# Altium PCB PCB_jaustry3.PcbDoc (part 2 of 2)
Units mm, origin at the board's own origin, x right, y up, seen from the top; angles counter-clockwise.
Board outline 112 x 68.3 mm, 9 copper layers (Top Layer (Sig 1), Ground Plane 1, Signal Layer 2, Power Plane 1, Power Plane 2, Signal Layer 3, Mid-Layer 3, Ground Plane 2, Bottom Layer (Sig 4)), stack 1.963 mm thick; 217 components, 291 nets, 863 pads, 308 vias.
Unrouted connection lines stored in the file: 371.
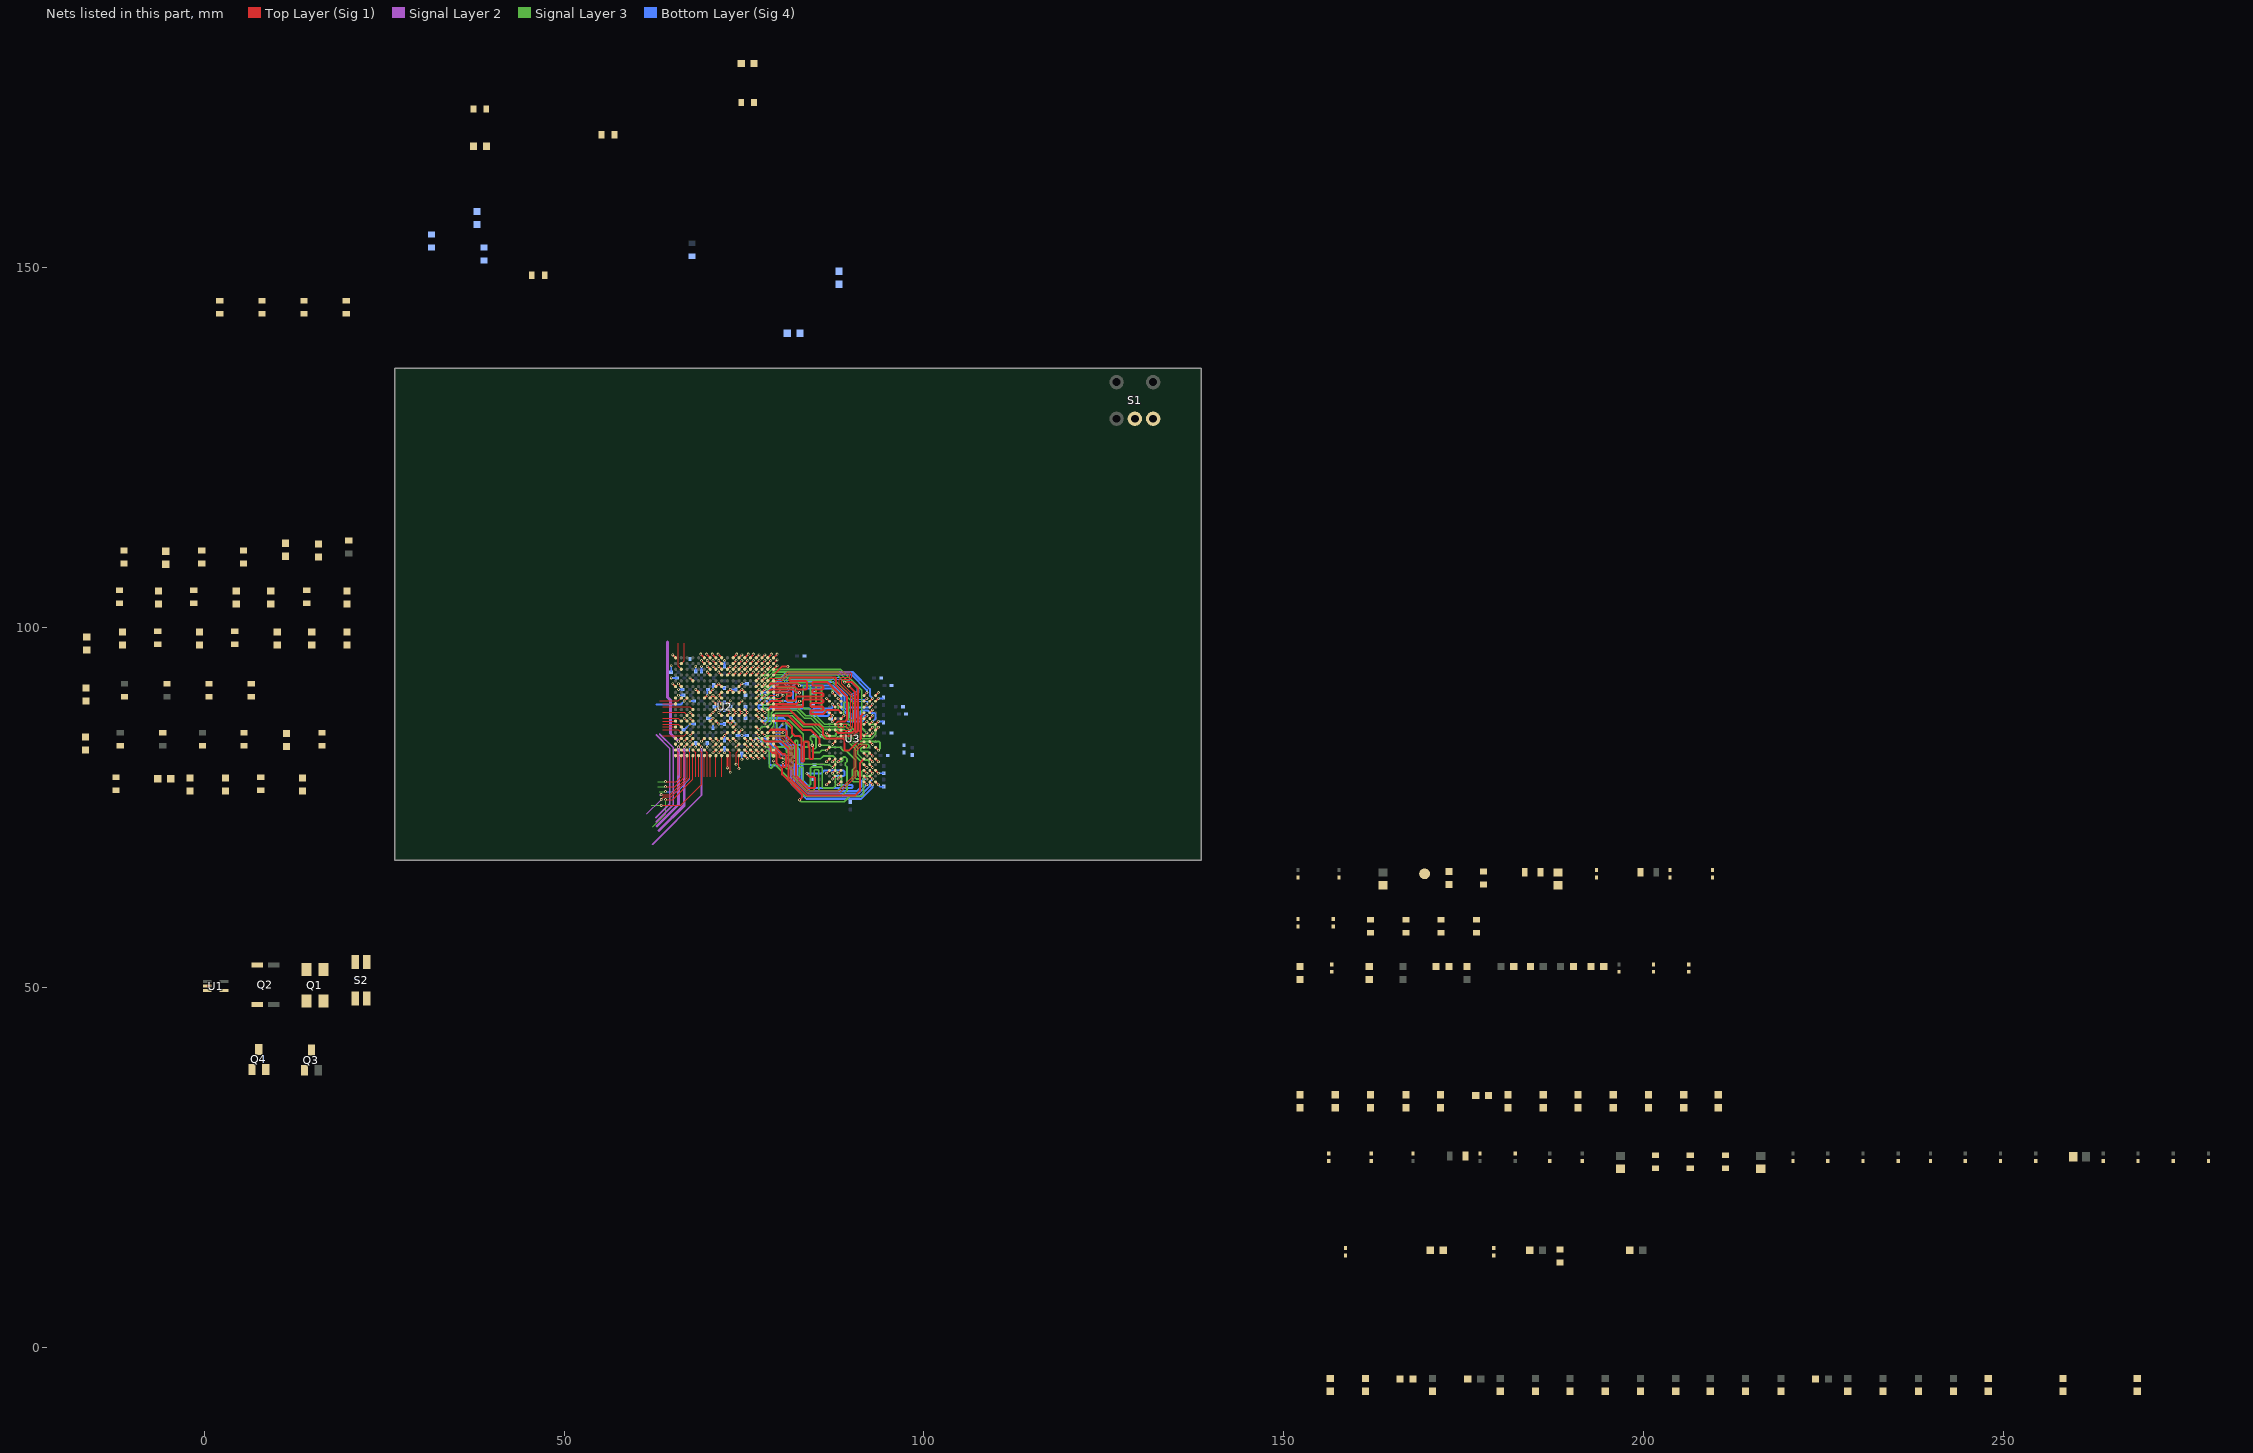
[diagram p8: the nets of this part, all layers, seen from the top]

## Via types
v1: diameter 0.4, hole 0.2, Top Layer (Sig 1) to Bottom Layer (Sig 4), 217 vias
v2: diameter 0.4, hole 0.2, Top Layer (Sig 1) to Bottom Layer (Sig 4), tented bottom, 77 vias
v3: diameter 0.457, hole 0.203, Top Layer (Sig 1) to Bottom Layer (Sig 4), tented both sides, 11 vias
v4: diameter 0.4, hole 0.2, Top Layer (Sig 1) to Bottom Layer (Sig 4), tented both sides, 2 vias
v5: diameter 0.2, hole 0.1, Top Layer (Sig 1) to Bottom Layer (Sig 4), 1 vias

## Nets (pads, with @x,y where several pads share a name; then routed paths per layer and width w, separated by ;. In a path a pad name is that pad's centre, name@x,y a point inside that pad or via, vN(x,y) a via of type N, cw(c..) or ccw(c..) an arc to the next point about the centre after c; other vN are vias at no path point) (continued)
A1: U2.H1 U3.P7 | length 24.1
  Top Layer (Sig 1) w0.25: U3.P7@91.68,80.155 v2(92.08,79.755)
  Top Layer (Sig 1) w0.284: U2.H1@79.1,87.8 81.119,87.801 83.158,85.762 84.301,85.762 85.507,84.556 v3(85.507,83.667)
  Signal Layer 3 w0.234: v3(85.507,83.667) 85.514,83.66 86.777,83.66 87.082,83.356 88.358,83.356 88.809,82.905 89.19,82.905 90.46,81.635 90.46,80.619 90.079,80.238 90.079,78.688 90.206,78.561 90.968,78.561 91.095,78.688 91.095,78.841 90.968,78.968 90.587,78.968 90.46,79.095 90.46,79.984 90.587,80.111 90.714,80.111 90.841,79.984 90.841,79.476 90.968,79.349 91.222,79.349 91.349,79.476 91.349,79.984 91.476,80.111 91.724,80.111 v2(92.08,79.755)
A2: U2.E4 U3.P3 | length 23.9
  Top Layer (Sig 1) w0.15: U2.E4@76.7,85.401 v3(77.1,85.001)
  Top Layer (Sig 1) w0.25: v2(88.08,79.755) U3.P3@88.479,80.155
  Signal Layer 3 w0.234: v3(77.1,85.001) 77.1,84.775 77.7,84.175 80.936,84.175 81.698,84.937 81.698,85.826 80.835,86.689 80.835,86.868 81.082,87.115 81.298,87.115 83.222,85.191 83.222,84.175 83.349,84.048 83.984,84.048 84.086,83.946 84.086,83.515 83.984,83.413 83.349,83.413 83.222,83.286 83.222,81.889 83.349,81.762 85.635,81.762 86.016,82.143 87.413,82.143 87.68,81.876 87.68,80.155 v2(88.08,79.755)
  other v1: 77.1,85
A3: U2.C3 U3.N2 | length 24
  Top Layer (Sig 1) w0.25: U2.C3@77.5,83.8 v1(77.9,83.4) ; v2(87.28,80.555) U3.N2@87.679,80.955
  Signal Layer 3 w0.234: v1@77.901,83.4 78.777,83.4 78.904,83.273 78.904,82.143 79.031,82.016 79.285,82.016 79.412,82.143 79.412,83.273 79.539,83.4 81.622,83.4 81.698,83.324 81.698,83.108 81.622,83.032 80.949,83.032 80.872,82.956 80.872,82.727 80.949,82.651 81.622,82.651 81.698,82.575 81.698,82.346 81.622,82.27 80.949,82.27 80.872,82.194 80.872,81.99 80.949,81.914 81.114,81.914 81.19,81.838 81.19,81.457 81.266,81.381 81.495,81.381 81.571,81.457 81.571,81.838 81.647,81.914 82.003,81.914 82.079,81.99 82.079,84.226 82.155,84.302 82.384,84.302 82.46,84.226 82.46,81.127 82.587,81 86.143,81 86.188,80.955 86.88,80.955 v2(87.28,80.555)
A4: U2.C2 U3.P8 | length 23.9
  Top Layer (Sig 1) w0.25: U3.P8@92.48,80.155 v2(92.88,79.755)
  Top Layer (Sig 1) w0.284: U2.C2@78.298,83.801 78.695,83.404 78.695,82.842 78.934,82.604 79.256,82.604 79.537,82.323 79.537,81.127 80.299,80.365 80.299,79.603 83.093,76.809 83.093,76.428 v3(82.712,76.047)
  Signal Layer 3 w0.234: v3(82.712,76.047) 82.966,75.793 88.935,75.793 89.697,76.555 91.348,76.555 91.602,76.809 91.602,79.095 91.862,79.355 92.478,79.355 v2@92.878,79.755
A5: U2.B1 U3.P2 | length 23.9
  Top Layer (Sig 1) w0.25: v2(87.28,79.755) U3.P2@87.679,80.155
  Top Layer (Sig 1) w0.284: U2.B1@79.099,83 79.315,83 79.919,82.396 79.919,82.015 80.046,81.888 v1@80.427,81.888
  Signal Layer 3 w0.234: v1@80.428,81.889 80.872,81.445 80.872,80.994 81.12,80.746 81.749,80.746 81.825,80.822 81.825,81.432 81.901,81.508 82.13,81.508 82.206,81.432 82.206,79.476 82.333,79.349 82.587,79.349 82.714,79.476 82.714,80.492 82.841,80.619 83.095,80.619 83.222,80.492 83.222,78.333 83.476,78.079 84.111,78.079 84.238,78.206 84.238,80.492 84.365,80.619 85.762,80.619 85.889,80.492 85.889,77.825 86.016,77.698 87.413,77.698 87.679,77.964 87.679,79.356 v2(87.28,79.755)
  other v1: 80.429,81.888
A6: U2.D5 U3.R8 | length 24.1
  Top Layer (Sig 1) w0.25: U2.D5@75.9,84.6 v1(76.3,84.2) ; U3.R8@92.48,79.355 v2(92.88,78.955)
  Bottom Layer (Sig 4) w0.284: v1(76.3,84.2) 76.7,84.6 77.97,84.6 80.173,82.397 80.554,82.397 81.951,81 81.951,78.46 83.856,76.555 91.095,76.555 92.479,77.939 92.479,78.555 v2(92.88,78.955)
A7: U2.E2 U3.R2 | length 24.1
  Top Layer (Sig 1) w0.25: v2(87.28,78.955) U3.R2@87.679,79.355
  Top Layer (Sig 1) w0.284: U2.E2@78.3,85.401 78.7,85.802 80.707,85.802 80.936,85.572 80.936,84.937 82.206,83.667 82.206,79.476 83.984,77.698 84.746,77.698 84.873,77.825 84.873,79.095 84.746,79.222 84.213,79.222 v2(83.73,79.705)
  Bottom Layer (Sig 4) w0.284: v2(83.73,79.705) 85.737,79.705 86.187,80.155 88.81,80.155 88.937,80.028 88.937,79.482 88.81,79.355 87.679,79.355 v2(87.28,78.955)
A8: U2.D4 U3.T8 | length 23.9
  Top Layer (Sig 1) w0.25: U2.D4@76.7,84.6 v1(77.1,84.2) ; U3.T8@92.48,78.555 v2(92.88,78.155)
  Bottom Layer (Sig 4) w0.284: v1(77.1,84.2) 77.862,84.2 78.522,83.54 78.522,81.102 78.77,80.854 81.189,80.854 81.57,80.473 81.57,78.333 83.729,76.174 91.222,76.174 92.88,77.831 v2(92.88,78.155)
A9: U2.C1 U3.R3 | length 24
  Top Layer (Sig 1) w0.25: v2(88.08,78.955) U3.R3@88.479,79.355
  Top Layer (Sig 1) w0.284: U2.C1@79.099,83.8 79.665,83.234 79.665,83.101 80.37,82.396 80.681,82.396 80.827,82.25 80.827,80.735 80.71,80.618 80.544,80.618 80.427,80.735 v1(80.427,81.253)
  Signal Layer 3 w0.234: v1@80.428,81.254 80.428,80.873 80.936,80.365 81.571,80.365 81.825,80.111 81.825,79.222 83.73,77.317 84.619,77.317 84.746,77.444 84.746,80.111 84.873,80.238 85.254,80.238 85.381,80.111 85.381,77.444 85.508,77.317 88.048,77.317 88.556,77.825 88.556,79.222 88.429,79.349 88.207,79.349 88.08,79.222 v2(88.08,78.955)
A10: U2.F4 U3.L7 | length 24
  Top Layer (Sig 1) w0.15: U2.F4@76.642,86.2 U2.F4@76.7,86.2
  Top Layer (Sig 1) w0.25: U2.F4@76.7,86.2 v1(77.1,85.8) ; U3.L7@91.68,82.555 v2(92.08,82.155)
  Signal Layer 3 w0.234: v1(77.1,85.8) 77.5,86.2 78.262,86.2 78.776,86.714 78.776,88.111 79.164,88.499 82.326,88.499 83.412,87.413 84.301,87.413 85.888,85.825 88.936,85.825 90.968,83.793 92.238,83.793 92.365,83.666 92.365,83.412 92.238,83.285 91.349,83.285 91.222,83.158 91.222,82.904 91.349,82.777 92.238,82.777 92.365,82.65 92.365,82.441 v2(92.08,82.155)
A11: U2.F2 U3.R7 | length 21.6
  Top Layer (Sig 1) w0.25: U3.R7@91.68,79.355 v2(92.08,78.955)
  Bottom Layer (Sig 4) w0.284: v1@80.427,86.6 79.919,86.092 79.919,84.556 81.189,83.286 82.459,83.286 82.713,83.032 82.713,78.714 84.11,77.317 90.714,77.317 91.349,77.952 91.349,78.701 91.603,78.955 v2(92.08,78.955)
  other v1: 80.428,86.6
A12: U2.E3 U3.N7 | length 24.1
  Top Layer (Sig 1) w0.25: U2.E3@77.5,85.4 v1(77.9,85) ; U3.N7@91.68,80.955 v2(92.08,80.555)
  Signal Layer 3 w0.234: v1(77.9,85) 77.964,84.937 80.681,84.937 80.935,85.191 80.935,85.572 80.681,85.826 79.792,85.826 79.538,86.08 79.538,87.477 79.792,87.731 81.697,87.731 83.221,86.207 84.491,86.207 86.136,84.562 87.8,84.562 88.047,84.81 88.809,84.81 90.46,83.159 90.46,82.174 v2(92.08,80.555)
A13: U2.H3 U3.T3 | length 24
  Top Layer (Sig 1) w0.25: U2.H3@77.5,87.8 v1(77.9,87.4) ; v2(88.08,78.155) U3.T3@88.479,78.555
  Bottom Layer (Sig 4) w0.284: v1@77.901,87.401 80.504,87.401 80.936,86.969 80.936,84.048 81.317,83.667 82.841,83.667 83.095,83.413 83.095,78.841 84.238,77.698 89.953,77.698 90.08,77.825 90.08,78.028 89.953,78.155 v2(88.08,78.155)
A14: U2.H4 U3.T7 | length 24
  Top Layer (Sig 1) w0.25: U2.H4@76.7,87.8 v1(77.1,87.4) ; U3.T7@91.68,78.555 v2(92.08,78.155)
  Bottom Layer (Sig 4) w0.284: v1@77.1,87.401 77.1,87.375 77.475,87 79.126,87 79.538,86.588 79.538,84.429 82.332,81.635 82.332,78.587 83.983,76.936 90.86,76.936 v2(92.08,78.155)
A15: U2.D3 U3.M7 | length 24.1
  Top Layer (Sig 1) w0.284: U2.D3@77.5,84.6 77.902,84.198 80.151,84.198 81.19,83.159 81.19,79.222 83.73,76.682 90.461,76.682 91.096,77.317 91.096,81.171 U3.M7@91.68,81.755
ACK_N: U2.D1 U3.K7 | length 24
  Top Layer (Sig 1) w0.13: U2.D1@79.1,84.6 79.208,84.707 80.261,84.707 81.571,83.398 81.571,79.348 83.882,77.037 88.277,77.037 90.613,79.373 90.613,82.89 91.435,83.711 91.951,83.711 92.055,83.607 92.055,83.459 91.951,83.355 U3.K7@91.68,83.355
ACK_P: U2.D2 U3.J7 | length 24
  Top Layer (Sig 1) w0.13: U2.D2@78.3,84.6 78.687,84.987 78.935,84.987 78.938,84.99 79.262,84.99 79.265,84.987 80.377,84.987 81.85,83.514 81.85,79.464 83.998,77.316 88.161,77.316 90.334,79.489 90.334,83.006 91.319,83.991 91.516,83.991 U3.J7@91.68,84.155
ADQSL_N: U2.P2 U3.G3 | length 23.3
  Top Layer (Sig 1) w0.13: U2.P2@78.3,92.6 78.684,92.984 78.933,92.984 78.938,92.99 79.262,92.99 79.267,92.984 80.221,92.984 81.088,93.851 89.688,93.851 89.978,93.561 89.978,93.107 89.688,92.816 89.271,92.816 89.263,92.824 88.937,92.824 88.936,92.823 88.843,92.823 88.836,92.816 88.703,92.816 88.55,92.663 88.55,92.181 90.08,90.651 90.08,86.206 89.629,85.755 U3.G3@88.48,85.755
ADQSL_P: U2.P1 U3.F3 | length 23.3
  Top Layer (Sig 1) w0.13: U2.P1@79.1,92.6 79.205,92.705 80.337,92.705 81.204,93.572 89.572,93.572 89.699,93.445 89.699,93.222 89.572,93.095 88.588,93.095 88.271,92.778 88.271,92.065 89.801,90.535 89.801,86.322 89.513,86.035 89.331,86.035 89.255,86.111 89.255,86.517 89.178,86.593 88.95,86.593 88.874,86.517 88.874,86.231 88.797,86.155 88.2,86.155 88.124,86.231 88.124,86.479 88.2,86.555 U3.F3@88.48,86.555
ADQSU_N: U2.L2 U3.B7 | length 20.3
  Top Layer (Sig 1) w0.13: U2.L2@78.3,90.2 78.701,90.6 v1@79.666,90.6 ; U3.B7@91.68,89.755 v2(92.08,90.155)
  Bottom Layer (Sig 4) w0.13: v1@79.665,90.597 79.919,90.851 79.919,91.145 80.21,91.435 80.935,91.435 81.062,91.562 81.062,91.715 80.681,92.096 80.681,92.553 81.22,93.092 89.554,93.092 90.993,91.653 90.993,91.04 90.601,90.648 90.333,90.648 90.206,90.521 90.206,90.165 90.333,90.038 91.965,90.038 v2@92.079,90.152
  other v1: 79.666,90.6
ADQSU_P: U2.L1 U3.C7 | length 20.3
  Top Layer (Sig 1) w0.13: U2.L1@79.1,90.2 80.027,90.2 v1(80.428,90.6) ; U3.C7@91.68,88.955 91.68,88.962 v1(92.075,89.357)
  Bottom Layer (Sig 4) w0.13: v1(80.428,90.6) 80.199,90.829 80.199,91.032 80.326,91.159 81.052,91.159 81.342,91.45 81.342,91.834 80.961,92.215 80.961,92.44 81.337,92.816 88.836,92.816 88.843,92.823 88.936,92.823 88.937,92.824 89.263,92.824 89.271,92.816 89.439,92.816 90.715,91.54 90.715,91.159 90.486,90.93 90.218,90.93 89.928,90.64 89.928,90.053 90.218,89.762 92.118,89.762 92.195,89.686 92.195,89.432 92.118,89.356 v1@92.08,89.356
AGND: C123.2 C124.2 C129.2 C130.2 C131.2 C136.2 C137.1 C138.1 C139.1 C140.2 C179.2 C182.1 C189.1 C193.2 C196.1 R63.2 R75.2 R99.2
"AUDIO IN LEFT": C122.2
"AUDIO IN RIGHT": C127.2
"AUDIO OUT LEFT": R59.2
"AUDIO OUT RIGHT": R72.2
BA0: U2.C4 U3.M2 | length 1.1
  Top Layer (Sig 1) w0.25: U2.C4@76.7,83.8 v1(77.1,83.4) ; v2(87.28,81.355) U3.M2@87.679,81.755
BA1: U2.E1 U3.N8 | length 24.1
  Top Layer (Sig 1) w0.15: U2.E1@79.1,85.4 v1(80.427,85.401)
  Top Layer (Sig 1) w0.25: U2.E1@79.1,85.4 U2.E1@79.125,85.375 ; U3.N8@92.48,80.955 v2(92.88,80.555)
  Signal Layer 3 w0.234: v1(80.427,85.401) 79.201,85.401 78.903,85.699 78.903,86.08 79.157,86.334 79.157,87.858 79.411,88.112 81.951,88.112 83.513,86.55 84.656,86.55 86.269,84.937 87.666,84.937 87.793,85.064 87.793,85.318 87.92,85.445 88.682,85.445 90.813,83.314 90.813,82.425 91.632,81.606 92.238,81.606 92.4,81.444 92.4,81.034 v2(92.88,80.555)
BA2: U2.B3 U3.M3 | length 24.1
  Top Layer (Sig 1) w0.25: U2.B3@77.5,83 v1(77.9,82.6) ; v2(88.08,81.355) U3.M3@88.479,81.755
  Signal Layer 3 w0.234: v1@77.901,82.6 78.205,82.905 78.396,82.905 78.523,82.778 78.523,80.619 78.65,80.492 78.84,80.492 78.967,80.619 78.967,80.873 79.094,81 79.285,81 81.063,79.222 81.063,78.968 83.476,76.555 88.556,76.555 89.318,77.317 89.318,80.619 89.064,80.873 89.064,81.127 89.318,81.381 89.318,81.762 89.064,82.016 88.81,82.016 88.683,81.889 88.683,81.482 88.556,81.355 v2(88.08,81.355)
C_VinL: R65.2
C_VinR: R71.2
C_VoutL+: C142.2
C_VoutL-: C141.2
C_VoutR+: C144.2
C_VoutR-: C143.2
CKE: R13.2 U2.G3 U3.K9 | length 24.1
  Top Layer (Sig 1) w0.25: U2.G3@77.5,87 v1(77.9,86.6) ; U3.K9@93.28,83.355 v2(93.68,82.955)
  Signal Layer 3 w0.234: v1@77.9,86.6 78.395,87.095 78.395,88.619 78.268,88.746 77.76,88.746 77.633,88.873 77.633,89.127 77.76,89.254 79.411,89.254 79.792,88.873 82.459,88.873 83.602,87.73 84.491,87.73 86.015,86.206 89.19,86.206 91.222,84.174 93.762,84.174 93.889,84.047 93.889,83.165 v2(93.68,82.955)
DDR_VREF: C14.1 C16.2 C17.2 C42.1 R4.1 R5.2 U2.J4 U3.H1 U3.M8 | length 1.7
  Top Layer (Sig 1) w0.25: U2.J4@76.7,88.6 v1(77.1,88.2) ; v2(86.48,85.355) U3.H1@86.88,84.955 ; U3.M8@92.48,81.755 v2(92.88,81.355)
DML: U2.M2 U3.E7 | length 23.3
  Top Layer (Sig 1) w0.25: U3.E7@91.68,87.355 v2(92.08,87.755)
  Top Layer (Sig 1) w0.284: U2.M2@78.3,91 78.7,91.4 81.837,91.4 82.282,90.955 v3(82.714,90.955)
  Bottom Layer (Sig 4) w0.284: v3(82.714,90.955) 82.333,90.955 82.206,90.828 82.206,89.381 82.333,89.254 83.095,89.254 83.222,89.381 83.222,91.413 83.349,91.54 87.286,91.54 88.556,90.27 88.556,88.746 89.318,87.984 89.318,87.095 89.445,86.968 91.477,86.968 91.604,87.095 91.604,87.628 91.731,87.755 v2(92.08,87.755)
DMU: U2.J2 U3.D3 | length 20.2
  Top Layer (Sig 1) w0.284: U2.J2@78.3,88.6 78.7,89 83.095,89 83.222,89.127 83.222,89.889 83.349,90.016 85.889,90.016 86.016,89.889 86.016,89.635 85.889,89.508 84.365,89.508 84.238,89.381 84.238,89.127 84.365,89 85.889,89 86.016,88.873 86.016,88.619 85.889,88.492 84.365,88.492 84.238,88.365 84.238,88.111 84.365,87.984 86.016,87.984 86.587,88.555 88.08,88.555 U3.D3@88.48,88.155
DQ0: U2.M3 U3.E3 | length 23.3
  Top Layer (Sig 1) w0.25: U2.M3@77.5,91 v1(77.9,91.4) ; U3.E3@88.48,87.355 v2(88.88,87.755)
  Signal Layer 3 w0.234: v1(77.9,91.4) 78.256,91.4 79.539,92.683 87.032,92.683 90.334,89.381 90.334,87.222 90.207,87.095 89.699,87.095 89.572,87.222 89.572,89.508 89.445,89.635 89.007,89.635 88.88,89.508 v2(88.88,87.755)
DQ1: U2.M4 U3.F7 | length 23.3
  Top Layer (Sig 1) w0.25: U2.M4@76.7,91 v1(77.1,91.4) ; U3.F7@91.68,86.555 v2(92.08,86.955)
  Signal Layer 3 w0.234: v1(77.1,91.4) 77.501,91 77.501,90.434 77.735,90.2 79.355,90.2 80.301,89.254 82.841,89.254 83.349,88.746 83.984,88.746 86.181,86.549 89.483,86.549 91.47,84.561 92.661,84.561 93.28,85.181 93.28,85.529 93.28,86.321 93.045,86.555 92.48,86.555 v2(92.08,86.955)
DQ2: U2.N1 U3.F2 | length 23.3
  Top Layer (Sig 1) w0.284: U2.N1@79.1,91.8 82.073,91.8 82.46,91.413 83.603,91.413 83.73,91.54 83.73,92.429 83.603,92.556 81.444,92.556 81.317,92.683 81.317,92.937 81.444,93.064 87.667,93.064 87.794,92.937 87.794,91.921 89.312,90.403 89.312,87.222 89.048,86.958 88.559,86.958 88.556,86.956 88.08,86.956 U3.F2@87.68,86.555
DQ3: U2.N2 U3.F8 | length 25.8
  Top Layer (Sig 1) w0.15: U2.N2@78.3,91.8 78.699,92.199 ; 78.7,92.2 80.6,92.2
  Top Layer (Sig 1) w0.25: U3.F8@92.48,86.555 v2(92.88,86.955)
  Top Layer (Sig 1) w0.284: U2.N2@78.3,91.8 78.699,92.199 82.435,92.199 v1@82.714,91.921
  Bottom Layer (Sig 4) w0.284: v1@82.714,91.921 87.413,91.921 88.937,90.397 88.937,88.873 89.762,88.047 89.762,87.476 89.889,87.349 90.08,87.349 90.207,87.476 90.207,88.365 90.334,88.492 90.588,88.492 90.715,88.365 90.715,87.476 90.842,87.349 91.096,87.349 91.223,87.476 91.223,88.365 91.35,88.492 92.156,88.492 92.493,88.155 93.083,88.155 93.28,87.959 93.28,87.355 v2(92.88,86.955)
  other v1: 82.714,91.919
DQ4: U2.N3 U3.H3 | length 23.9
  Top Layer (Sig 1) w0.25: U2.N3@77.5,91.8 77.778,92.078 v1(77.9,92.2)
  Top Layer (Sig 1) w0.284: U2.N3@77.5,91.8 77.778,92.078 v1(77.9,92.2) ; U3.H3@88.48,84.955 90.099,84.955 90.842,85.698 90.842,91.54 89.952,92.43 89.951,92.429 v3(89.006,92.429)
  Signal Layer 3 w0.234: v3(77.901,92.201) 77.913,92.201 79.158,93.445 87.921,93.445 88.937,92.429 v3(89.006,92.429)
DQ5: U2.N4 U3.H8 | length 23.3
  Top Layer (Sig 1) w0.25: U2.N4@76.7,91.8 v1(77.1,92.2) ; U3.H8@92.48,84.955 v2(92.88,85.355)
  Signal Layer 3 w0.234: v1(77.1,92.2) 77.501,91.8 78.148,91.8 79.412,93.064 87.286,93.064 90.842,89.508 90.842,85.825 91.731,84.936 92.461,84.936 v2(92.88,85.355)
DQ6: U2.P3 U3.G2 | length 23.8
  Top Layer (Sig 1) w0.25: U2.P3@77.5,92.6 77.504,92.604 v1(77.9,93)
  Top Layer (Sig 1) w0.284: U2.P3@77.5,92.6 77.504,92.604 v1(77.9,93) ; U3.G2@87.68,85.755 88.083,85.352 89.988,85.352 90.461,85.825 90.461,91.032 v3(89.572,91.921)
  Signal Layer 3 w0.234: v3(77.901,93.001) 78.206,93.001 79.031,93.826 88.175,93.826 89.572,92.429 v3(89.572,91.921)
DQ7: U2.P4 U3.H7 | length 23.3
  Top Layer (Sig 1) w0.25: U2.P4@76.7,92.6 v1(77.1,93) ; U3.H7@91.68,84.955 v2(92.08,85.355)
  Signal Layer 3 w0.234: v1(77.1,93) 77.501,93.401 78.098,93.401 78.879,94.182 88.454,94.182 91.35,91.286 91.35,86.085 v2(92.08,85.355)
DQ8: U2.J1 U3.D7 | length 20.3
  Top Layer (Sig 1) w0.284: U2.J1@79.1,88.6 81.336,88.6 83.412,86.523 85.444,86.523 85.952,86.015 85.952,85.126 86.524,84.555 88.81,84.555 88.937,84.428 88.937,83.031 89.064,82.904 89.572,82.904 91.223,84.555 91.223,87.698 U3.D7@91.68,88.155
DQ9: U2.K1 U3.C3 | length 20.3
  Top Layer (Sig 1) w0.284: U2.K1@79.1,89.4 82.352,89.399 v4(82.714,89.762) ; v2(88.08,89.355) U3.C3@88.48,88.955
  Signal Layer 3 w0.234: v4(82.714,89.762) 83.095,89.762 83.222,89.889 83.222,91.794 83.349,91.921 84.111,91.921 84.238,91.794 84.238,89.635 84.365,89.508 84.873,89.508 85,89.635 85,91.794 85.127,91.921 85.635,91.921 85.762,91.794 85.762,88.619 85.889,88.492 87.953,88.492 88.08,88.619 v2(88.08,89.355)
DQ10: U2.K2 U3.C8 | length 20.3
  Top Layer (Sig 1) w0.25: U3.C8@92.48,88.955 v2(92.88,89.355)
  Top Layer (Sig 1) w0.284: U2.K2@78.3,89.4 78.699,89.799 v4(80.428,89.799)
  Bottom Layer (Sig 4) w0.284: v4(80.428,89.799) 80.898,89.799 81.063,89.634 81.698,89.634 81.825,89.761 81.825,91.92 82.333,92.428 87.413,92.428 89.318,90.523 89.318,89.126 89.572,88.872 92.397,88.872 v2(92.88,89.355)
DQ11: U2.K3 U3.C2 | length 20.3
  Top Layer (Sig 1) w0.15: U2.K3@77.5,89.4 U2.K3@77.507,89.4
  Top Layer (Sig 1) w0.25: U2.K3@77.5,89.4 v1(77.9,89.8) ; v2(87.28,89.355) U3.C2@87.68,88.955
  Bottom Layer (Sig 4) w0.284: v1@77.901,89.799 78.142,89.799 78.269,89.672 78.269,89.38 78.142,89.253 77.126,89.253 76.999,89.126 76.999,88.872 77.126,88.745 84.111,88.745 84.238,88.618 84.238,87.856 84.365,87.729 86.651,87.729 86.778,87.856 86.778,88.11 86.651,88.237 84.746,88.237 84.619,88.364 84.619,88.618 84.746,88.745 87.153,88.745 87.28,88.872 v2(87.28,89.355)
DQ12: U2.K4 U3.A7 | length 20.2
  Top Layer (Sig 1) w0.15: U2.K4@76.7,89.4 v1(77.1,89.8)
  Top Layer (Sig 1) w0.25: U3.A7@91.68,90.555 v2(92.08,90.955)
  Bottom Layer (Sig 4) w0.284: v1(77.1,89.8) 77.501,90.2 78.523,90.2 78.65,90.073 78.65,89.952 78.777,89.825 79.031,89.825 79.158,89.952 79.158,91.539 81.126,93.508 89.889,93.508 92.08,91.317 v2(92.08,90.955)
DQ13: U2.L3 U3.A2 | length 20.2
  Top Layer (Sig 1) w0.15: U2.L3@77.5,90.2 v1(77.9,90.6)
  Top Layer (Sig 1) w0.25: v2(87.28,90.955) U3.A2@87.68,90.555
  Signal Layer 3 w0.234: v1@77.901,90.599 78.219,90.599 78.65,91.031 80.809,91.031 80.936,90.904 80.936,89.888 81.063,89.761 82.079,89.761 82.206,89.888 82.206,91.539 82.079,91.666 79.793,91.666 79.666,91.793 79.666,92.199 79.793,92.326 86.753,92.326 87.286,91.793 87.286,90.961 v2(87.28,90.955)
DQ14: U2.L4 U3.B8 | length 20.3
  Top Layer (Sig 1) w0.15: U2.L4@76.7,90.2 v1(77.1,90.599)
  Top Layer (Sig 1) w0.25: U3.B8@92.48,89.755 v2(92.88,90.155)
  Bottom Layer (Sig 4) w0.284: v1(77.1,90.599) 77.501,91 78.11,91 80.936,93.825 90.08,93.825 92.48,91.425 92.48,90.555 v2(92.88,90.155)
DQ15: U2.M1 U3.A3 | length 20.1
  Top Layer (Sig 1) w0.284: U2.M1@79.1,91 79.92,90.999 81.444,91 81.571,90.873 81.571,90.65 81.444,90.523 81.063,90.523 80.936,90.396 80.936,90.015 81.063,89.888 82.079,89.888 82.206,90.015 82.206,90.269 82.333,90.396 85.889,90.396 86.016,90.523 86.016,90.777 85.889,90.904 84.619,90.904 84.492,91.031 84.492,91.285 84.619,91.412 85.889,91.412 86.016,91.539 86.016,91.793 85.889,91.92 84.619,91.92 84.492,92.047 84.492,92.301 84.619,92.428 86.607,92.428 U3.A3@88.48,90.555
DSP_BYPASS: U2.C14 | length 16.9
  Top Layer (Sig 1) w0.25: U2.C14@68.7,83.8 v1(69.1,83.4)
  Signal Layer 2 w0.25: 62.3,69.9 69.1,76.7 v1(69.1,83.4)
EXTINT: U2.B18 | length 3.7
  Top Layer (Sig 1) w0.15: U2.B18@65.5,83 65.9,82.6 65.9,79.5
GND: C13.1 C15.1 C16.1 C17.1 C18.1 C19.1 C20.2 C21.2 C22.1 C23.2 C24.2 C25.2 C26.2 C27.2 C28.2 C29.2 C29_1.2 C30.2 C31.2 C32.2 C33.2 C34.2 C35.2 C36.2 C37.2 C38.2 C42.2 C43.1 C44.1 C45.1 C46.1 C49_1.2 C50_1.2 C51.1 C52_1.2 C53_1.2 C54.2 C55_1.2 C56_1.2 C57_1.2 C58_1.2 C59_1.2 C60_1.2 C61_1.2 C62.2 C63.2 C64.2 C65_1.2 C66_1.2 C67.2 C68_1.2 C69.2 C70.2 C71.2 C72.2 C73.2 C74.2 C75_1.2 C76.2 C77_1.2 C78_1.2 C79_1.2 C80_1.2 C81_1.2 C82_1.2 C83.1 C84.1 C85.1 C86.1 C87_1.1 C88_1.2 C89_1.2 C90_1.2 C91.2 C92_1.2 C93.2 C94_1.2 C95.1 C96.1 C97.1 C98.1 C99_1.2 C100.2 C101.2 C102.2 C103.2 C106_1.1 C107.2 C108_1.1 C109_1.2 C110_1.2 C111_1.2 C112.2 C113.2 C114.1 C132.2 C133.1 L3.1 Q1.2 Q1.4 R5.1 R11.2 R13.1 R14.1 R15.1 R16.1 R36.1 R37.1 R38.1 R39.1 R40.1 R41.1 R42.1 R43.1 R44.1 R45.1 R46.1 R47.1 R48.1 R49.1 R50.1 R51.1 S2.1 S2.3 U1.3 U2.A1 U2.A5 U2.A18 U2.F8 U2.G8 U2.G9 U2.G11 U2.G12 U2.H6 U2.H7 U2.H8 U2.H9 U2.H10 U2.H12 U2.J6 U2.J7 U2.J8 U2.J9 U2.J10 U2.J11 U2.K7 U2.K9 U2.K10 U2.K11 U2.L10 U2.L11 U2.L12 U2.L13 U2.M6 U2.M7 U2.M8 U2.M9 U2.M10 U2.M12 U2.M14 U2.N7 U2.N10 U2.N11 U2.V1 U2.V11 U2.V18 U3.A9 U3.B1 U3.B3 U3.B9 U3.D1 U3.D8 U3.E1 U3.E2 U3.E8 U3.F9 U3.G1 U3.G8 U3.G9 U3.J2 U3.J8 U3.M1 U3.M9 U3.P1 U3.P9 U3.T1 U3.T9 | length 60.4
  Top Layer (Sig 1) w0.25: v1(65.1,96.2) U2.V18@65.5,95.8 ; v1(68.3,91.4) U2.M14@68.7,91 ; U2.L13@69.5,90.2 v1(69.9,90.6) ; U2.G12@70.3,87 v1(70.7,87.4) ; U2.H12@70.3,87.8 v1(70.7,88.2) U2.J11@71.1,88.6 ; U2.L12@70.3,90.2 v1(70.7,90.6) U2.L11@71.1,90.2 ; U2.M12@70.3,91 v1(70.7,91.4) ; v1(70.6,96.3) U2.V11@71.1,95.8 ; v1(70.7,89.8) U2.K11@71.1,89.4 ; U2.G11@71.1,87 v1(71.5,86.6) ; U2.N11@71.1,91.8 v1(71.5,92.2) U2.N10@71.9,91.8 U2.N10@71.875,91.775 ; v1(71.5,88.2) U2.H10@71.9,87.8 ; v1(71.5,89) U2.J10@71.9,88.6 ; v1(71.5,89.8) U2.K10@71.9,89.4 ; U2.L10@71.9,90.2 v1(71.5,90.6) U2.M10@71.9,91 ; U2.G9@72.7,87 v1(73.1,86.6) U2.G8@73.5,87 ; U2.H9@72.7,87.8 v1(73.1,88.2) U2.J9@72.7,88.6 ; U2.K9@72.7,89.4 v1(73.1,89.8) ; U2.M9@72.7,91 v1(73.1,91.4) U2.M8@73.5,91 ; U2.F8@73.5,86.2 v1(73.9,86.6) ; U2.H8@73.5,87.8 v1(73.9,88.2) U2.J8@73.5,88.6 ; U2.H7@74.3,87.8 v1(74.7,88.2) U2.J7@74.3,88.6 ; U2.K7@74.3,89.4 v1(74.7,89.8) ; U2.M7@74.3,91 v1(74.7,91.4) U2.M6@75.1,91 ; U2.N7@74.3,91.8 v1(74.7,92.2) ; U2.H6@75.1,87.8 v1(75.5,88.2) U2.J6@75.1,88.6 ; U2.A5@75.9,82.2 v1(76.3,81.8) ; U2.V1@79.1,95.8 v1(79.6,96.3) ; v2(86.48,78.155) U3.T1@86.879,78.555 ; v2(86.48,79.755) U3.P1@86.879,80.155 ; v2(86.48,81.355) U3.M1@86.879,81.755 ; v2(86.48,90.155) U3.B1@86.88,89.755 ; U3.E1@86.88,87.355 v2(87.28,87.755) U3.D1@86.88,88.155 ; v2(87.263,86.938) U3.E2@87.68,87.355 ; v2(87.28,83.755) U3.J2@87.68,84.155 ; v2(88.08,90.155) U3.B3@88.48,89.755 ; U3.J8@92.48,84.155 v2(92.88,83.755) ; U3.G8@92.48,85.755 v2(92.88,86.155) ; U3.E8@92.48,87.355 v2(92.88,87.755) ; U3.D8@92.48,88.155 v2(92.88,88.555) ; U3.T9@93.28,78.555 v2(93.68,78.155) ; U3.P9@93.28,80.155 v2(93.68,79.755) ; U3.M9@93.28,81.755 v2(93.68,81.355) ; U3.G9@93.28,85.755 v2(93.68,86.155) ; U3.F9@93.28,86.555 v2(93.68,86.955) ; U3.B9@93.28,89.755 v2(93.68,90.155) ; U3.A9@93.28,90.555 v2(93.68,90.955)
  Bottom Layer (Sig 4) w0.15: v2(93.68,79.755) v2(93.68,79.755)
  Bottom Layer (Sig 4) w0.25: v1@64.892,93.008 v1(64.9,93) C89_1.2@65.692,93 ; C90_1.2@64.9,93.9 v1(64.9,94.692) ; v1(65.9,90.6) C65_1.2@66.592,90.6 ; v1(65.9,91.4) C78_1.2@66.492,91.4 ; C87_1.1@66.592,85.8 66.7,85.8 v1(67.5,86.6) C75_1.2@68.092,86.6 ; v1(67.5,89.8) C58_1.2@68.092,89.8 ; v1@68.292,91.408 v1(68.3,91.4) ; v1(68.3,83.4) C88_1.2@68.3,83.992 ; C92_1.2@68.3,93.908 v1(68.3,94.6) ; C79_1.2@69.1,93.908 v1(69.1,94.6) ; v1(69.9,83.4) C81_1.2@69.9,83.992 ; v1(69.9,90.6) 69.9,91.392 C61_1.2@69.908,91.4 ; C77_1.2@70.008,87.4 v1(70.7,87.4) v1@70.682,87.418 ; C50_1.2@70.7,86.008 v1(70.7,86.6) ; v1(70.7,91.4) C68_1.2@70.7,91.992 ; C57_1.2@70.908,89 v1(71.5,89) ; v1(71.5,86.6) C49_1.2@72.3,86.6 ; v1(71.5,88.2) 71.808,88.508 C52_1.2@72.3,88.508 ; v1(71.5,89.8) 71.708,89.592 C60_1.2@72.3,89.592 ; v1(71.5,92.2) 72.108,91.592 C59_1.2@72.3,91.592 ; v1(72.3,82.6) C99_1.2@72.3,83.292 C99_1.2@72.408,83.4 ; C108_1.1@72.3,94.608 v1(72.3,95.4) ; C56_1.2@73.1,89 v1(73.1,89.8) ; v1(73.1,91.4) 73.892,91.4 C82_1.2@73.9,91.392 ; C55_1.2@73.192,87.492 C55_1.2@73.192,87.4 73.192,87.308 v1(73.9,86.6) ; C94_1.2@74.108,85 v1(74.7,85) C29_1.2@75.392,85 ; v1(74.7,81.7) C106_1.1@74.7,82.492 ; v1(74.7,89.8) v1@74.708,89.808 ; v1(74.7,92.2) C66_1.2@75.392,92.2 ; C111_1.2@75.192,87.4 75.192,87.892 v1(75.5,88.2) 75.192,88.508 C109_1.2@75.192,89 ; v2(93.68,78.155) 93.945,77.89 C34.2@94.432,77.89 ; v2(93.68,79.755) C31.2@94.432,79.756 ; v2(93.68,86.955) C25.2@94.279,86.955 ; v2(93.68,90.155) C28.2@94.29,90.155
  other v1: 79.114,81.471
GNDA_ADC: C47.2 C48.2 C104.2 C105.1 L3.2 U2.A9 U2.E8 | length 2.3
  Top Layer (Sig 1) w0.25: v1(72.7,80.5) U2.A9@72.7,82.2 ; U2.E8@73.5,85.4 v1(73.9,85.8)
GPIO_INTERRUPT: U2.L18
I2C0_SCL: U2.C16 | length 13.6
  Top Layer (Sig 1) w0.25: v1(66.7,83.4) U2.C16@67.1,83.8
  Signal Layer 2 w0.4: 63.2,71.8 66.7,75.3 v1(66.7,83.4)
I2C0_SDA: U2.C17 | length 12.8
  Top Layer (Sig 1) w0.25: v1(65.9,83.4) U2.C17@66.3,83.8
  Signal Layer 2 w0.4: 62.936,72.436 65.9,75.4 v1(65.9,83.4)
I2C1_SCL: U2.D15 | length 0.6
  Top Layer (Sig 1) w0.25: v1(67.5,84.2) U2.D15@67.9,84.6
I2C1_SDA: U2.D16 | length 0.6
  Top Layer (Sig 1) w0.25: v1(66.7,84.2) U2.D16@67.1,84.6
I2C2_SCL: U2.D17 | length 15
  Top Layer (Sig 1) w0.25: v1(65.9,84.2) U2.D17@66.3,84.6
  Signal Layer 2 w0.4: 64.4,98 64.4,90.3 64.8,89.9 64.8,85.3 v1(65.9,84.2)
I2C2_SDA: U2.D18
LCD_B0: U2.U10 | length 0.6
  Top Layer (Sig 1) w0.25: v1(71.5,95.4) U2.U10@71.9,95
LCD_B1: U2.U12 | length 0.6
  Top Layer (Sig 1) w0.25: v1(69.9,95.4) U2.U12@70.3,95
LCD_B2: U2.V13 | length 0.7
  Top Layer (Sig 1) w0.25: v1(69,96.3) U2.V13@69.5,95.8
LCD_B3: R31.1 R47.2 U2.U4 | length 0.6
  Top Layer (Sig 1) w0.25: U2.U4@76.7,95 v1(77.1,95.4)
LCD_B4: R32.1 R48.2 U2.V2 | length 0.7
  Top Layer (Sig 1) w0.25: U2.V2@78.3,95.8 v1(78.8,96.3)
LCD_B5: R33.1 R49.2 U2.V3 | length 0.6
  Top Layer (Sig 1) w0.25: U2.V3@77.5,95.8 v1(77.9,96.2)
LCD_B6: R34.1 R50.2 U2.V4 | length 0.6
  Top Layer (Sig 1) w0.25: U2.V4@76.7,95.8 v1(77.1,96.2)
LCD_B7: R35.1 R51.2 U2.T5 | length 0.6
  Top Layer (Sig 1) w0.25: U2.T5@75.9,94.2 v1(76.3,94.6)
LCD_BKL: Q3.3 R16.2 U2.C18
LCD_CLK: U2.V5 | length 0.7
  Top Layer (Sig 1) w0.25: U2.V5@75.9,95.8 76.3,96.2 v1(76.3,96.3)
LCD_DE: U2.R6 | length 0.6
  Top Layer (Sig 1) w0.25: U2.R6@75.1,93.4 v1(75.5,93.8)
LCD_G0: U2.T10 | length 0.6
  Top Layer (Sig 1) w0.25: v1(71.5,94.6) U2.T10@71.9,94.2
LCD_G1: U2.T12 | length 0.6
  Top Layer (Sig 1) w0.25: v1(69.9,94.6) U2.T12@70.3,94.2
LCD_G2: R25.1 R41.2 U2.T2 | length 0.6
  Top Layer (Sig 1) w0.25: U2.T2@78.3,94.2 v1(78.7,94.6)
LCD_G3: R26.1 R42.2 U2.T3 | length 0.6
  Top Layer (Sig 1) w0.25: U2.T3@77.5,94.2 v1(77.9,94.6)
LCD_G4: R27.1 R43.2 U2.T4 | length 0.6
  Top Layer (Sig 1) w0.25: U2.T4@76.7,94.2 v1(77.1,94.6)
LCD_G5: R28.1 R44.2 U2.U1 | length 0.7
  Top Layer (Sig 1) w0.25: U2.U1@79.1,95 v1(79.6,95.5)
LCD_G6: R29.1 R45.2 U2.U2 | length 0.6
  Top Layer (Sig 1) w0.25: U2.U2@78.3,95 v1(78.7,95.4)
LCD_G7: R30.1 R46.2 U2.U3 | length 0.6
  Top Layer (Sig 1) w0.25: U2.U3@77.5,95 v1(77.9,95.4)
LCD_HSYNC: U2.R5 | length 0.6
  Top Layer (Sig 1) w0.25: U2.R5@75.9,93.4 v1(76.3,93.8)
LCD_R0: U2.T11 | length 0.6
  Top Layer (Sig 1) w0.25: v1(70.7,94.6) U2.T11@71.1,94.2
LCD_R1: U2.R12 | length 0.6
  Top Layer (Sig 1) w0.25: v1(69.9,93.8) U2.R12@70.3,93.4
LCD_R2: U2.U13 | length 0.6
  Top Layer (Sig 1) w0.25: v1(69.1,95.4) U2.U13@69.5,95
LCD_R3: R20.1 R36.2 U2.R1 | length 2.5
  Top Layer (Sig 1) w0.25: U2.R1@79.1,93.4 80.268,94.568 v1(81.107,94.568)
LCD_R4: R21.1 R37.2 U2.R2
LCD_R5: R22.1 R38.2 U2.R3 | length 0.6
  Top Layer (Sig 1) w0.25: U2.R3@77.5,93.4 v1(77.9,93.8)
LCD_R6: R23.1 R39.2 U2.R4 | length 0.6
  Top Layer (Sig 1) w0.25: U2.R4@76.7,93.4 v1(77.1,93.8)
LCD_R7: R24.1 R40.2 U2.T1 | length 0.7
  Top Layer (Sig 1) w0.25: U2.T1@79.1,94.2 v1(79.6,94.7)
LCD_VSYNC: U2.U5 | length 0.6
  Top Layer (Sig 1) w0.25: U2.U5@75.9,95 v1(76.3,95.4)
LCD_X1: C43.2 U2.B6 | length 0.6
  Top Layer (Sig 1) w0.25: U2.B6@75.1,83 v1(75.5,82.6)
LCD_X2: C44.2 U2.C7 | length 0.6
  Top Layer (Sig 1) w0.25: v1(73.9,83.4) U2.C7@74.3,83.8
LCD_Y1: C45.2 U2.B7 | length 2.2
  Top Layer (Sig 1) w0.15: v1(73.9,81) 73.9,82.6 U2.B7@74.3,83
LCD_Y2: C46.2 U2.A7 | length 1.8
  Top Layer (Sig 1) w0.15: v1(74.3,80.4) U2.A7@74.3,82.2
LDO_PGOOD: U2.B5 | length 0.6
  Top Layer (Sig 1) w0.25: U2.B5@75.9,83 v1(76.3,82.6)
McASP0_BCLK: U2.A13 | length 2.9
  Top Layer (Sig 1) w0.15: 69.5,79.3 U2.A13@69.5,82.2
McASP0_LRCLK: U2.B13 | length 3.9
  Top Layer (Sig 1) w0.15: U2.B13@69.5,83 69.9,82.6 69.9,79.3
McASP0_MISO: U2.D13 | length 0.6
  Top Layer (Sig 1) w0.25: v1(69.1,84.2) U2.D13@69.5,84.6
McASP0_MOSI: U2.D12 | length 0.6
  Top Layer (Sig 1) w0.25: U2.D12@70.3,84.6 v1(70.7,84.2)
McASP0_SCLK: U2.A14 | length 2.9
  Top Layer (Sig 1) w0.15: 68.7,79.3 U2.A14@68.7,82.2
MIDI: 
NALE: U2.R7 | length 0.6
  Top Layer (Sig 1) w0.25: U2.R7@74.3,93.4 v1(74.7,93.8)
NCE0: U2.U6 U2.V6 | length 1.3
  Top Layer (Sig 1) w0.25: U2.U6@75.1,95 v1(75.5,95.4) ; U2.V6@75.1,95.8 v1(75.6,96.3)
NCLE: U2.T6 | length 0.6
  Top Layer (Sig 1) w0.25: U2.T6@75.1,94.2 v1(75.5,94.6)
NDQ0: U2.U7 | length 0.6
  Top Layer (Sig 1) w0.25: U2.U7@74.3,95 v1(74.7,95.4)
NDQ1: U2.V7 | length 0.6
  Top Layer (Sig 1) w0.25: U2.V7@74.3,95.8 v1(74.7,96.2)
NDQ2: U2.R8 | length 0.6
  Top Layer (Sig 1) w0.25: U2.R8@73.5,93.4 v1(73.9,93.8)
NDQ3: U2.T8 | length 0.6
  Top Layer (Sig 1) w0.25: U2.T8@73.5,94.2 v1(73.9,94.6)
NDQ4: U2.U8 | length 0.6
  Top Layer (Sig 1) w0.25: U2.U8@73.5,95 v1(73.9,95.4)
NDQ5: U2.V8 | length 0.7
  Top Layer (Sig 1) w0.25: U2.V8@73.5,95.8 v1(74,96.3)
NDQ6: U2.R9 | length 0.6
  Top Layer (Sig 1) w0.25: U2.R9@72.7,93.4 v1(73.1,93.8)
NDQ7: U2.T9 | length 0.6
  Top Layer (Sig 1) w0.25: U2.T9@72.7,94.2 v1(73.1,94.6)
NetC1_2: 
NetC8_1: S1.3
NetC8_2: 
NetC9_1: 
NetC9_2: 
NetC10_2: 
NetC13_2: C13.2 R3.1 S2.2 S2.4 U1.4 U2.A10 | length 2.9
  Top Layer (Sig 1) w0.15: 71.9,79.3 U2.A10@71.9,82.2
NetC15_2: C15.2 Q1.3 U2.V10 | length 0.7
  Top Layer (Sig 1) w0.25: v1(71.4,96.3) U2.V10@71.9,95.8
NetC18_2: C18.2 Q1.1 U2.U11 | length 0.6
  Top Layer (Sig 1) w0.25: v1(70.7,95.4) U2.U11@71.1,95
NetC19_2: C19.2 Q2.2 U2.A6 | length 0.6
  Top Layer (Sig 1) w0.25: U2.A6@75.1,82.2 v1(75.5,81.8)
NetC22_2: C22.2 Q2.1 U2.A4 | length 0.6
  Top Layer (Sig 1) w0.25: U2.A4@76.7,82.2 v1(77.1,81.8)
NetC39_1: R10.2
NetC84_2: C84.2 U2.D9 | length 0.6
  Top Layer (Sig 1) w0.25: U2.D9@72.7,84.6 v1(73.1,84.2)
NetC85_2: C85.2 U2.D11 | length 0.6
  Top Layer (Sig 1) w0.25: U2.D11@71.1,84.6 v1(71.5,84.2)
NetC86_2: C86.2 U2.C10 | length 0.6
  Top Layer (Sig 1) w0.25: v1(71.5,83.4) U2.C10@71.9,83.8
NetC99_1: C99_1.1 C100.1 C101.1 C102.1 C103.1 L1.1 U2.D10 U2.E7 U2.E9 U2.H15 U2.R10 | length 3.5
  Top Layer (Sig 1) w0.25: v1(67.5,88.2) U2.H15@67.9,87.8 ; v1(71.5,93.8) U2.R10@71.9,93.4 ; U2.D10@71.9,84.6 v1(72.3,85) U2.E9@72.7,85.4 ; U2.E7@74.3,85.4 v1(74.7,85.8)
  Bottom Layer (Sig 4) w0.25: C99_1.1@72.3,84.308 v1@72.3,85
NetC107_1: C107.1 U2.D6 | length 0.6
  Top Layer (Sig 1) w0.25: U2.D6@75.1,84.6 v1(75.5,84.2)
NetC117_2: 
NetC119_1: C119.1 R56.2 R59.1
NetC119_2: C119.2 R58.2
NetC120_1: C120.1 R62.2 R65.1
NetC120_2: C120.2 R62.1 R64.2
NetC121_1: C121.1 R60.2 R61.1 R63.1
NetC121_2: C121.2 R56.1 R57.2 R58.1
NetC122_1: C122.1 R64.1
NetC123_1: C123.1 R61.2
NetC125_1: C125.1 R67.2 R71.1
NetC125_2: C125.2 R67.1 R70.2
NetC126_1: C126.1 R66.2 R72.1
NetC126_2: C126.2 R69.2
NetC127_1: C127.1 R70.1
NetC128_1: C128.1 R73.2 R74.1 R75.1
NetC128_2: C128.2 R66.1 R68.2 R69.1
NetC130_1: C130.1 R74.2
NetC141_1: C141.1 R57.1
NetC142_1: C142.1 R60.1
NetC143_1: C143.1 R68.1
NetC144_1: C144.1 R73.1
NetC158_2: 
NetC159_2: 
NetC160_2: 
NetC171_2: 
NetC172_2: Q4.3 R17.1
NetC176_1: 
NetC176_2: 
NetC177_1: 
NetC177_2: 
NetC178_1: C179.1
NetC178_2: 
NetC181_2: C182.2
NetC183_2: 
NetC184_1: 
NetC184_2: 
NetC190_1: C190.1 R105.1
NetC190_2: C190.2 R105.2 R106.1
NetC191_1: R106.2
NetC191_2: 
NetC192_1: C193.1
NetC192_2: 
NetC195_2: C196.2
NetC197_2: 
NetC198_1: C198.1 R112.2 R116.1
NetC198_2: C198.2 R116.2
NetC199_1: 
NetC199_2: 
NetC200_1: 
NetC200_2: 
NetC201_2: 
NetC202_1: 
NetC203_1: 
NetC203_2: 
NetC204_1: 
NetC204_2: 
NetC205_2: 
NetC206_1: 
NetD9_1: 
NetD9_2: 
NetD10_1: 
NetD11_2: 
NetJ1_3: S1.2
NetJ2_1: J2.1 U2.A3 | length 0.6
  Top Layer (Sig 1) w0.25: U2.A3@77.5,82.2 77.9,81.8
NetJ4_5: 
NetJ4_6: 
NetJ4_11: 
NetJ4_12: 
NetL5_1: 
NetL6_1: 
NetL7_1: 
NetP4_1: U2.A12 | length 2.9
  Top Layer (Sig 1) w0.15: 70.3,79.3 U2.A12@70.3,82.2
NetP4_2: U2.C11 | length 0.6
  Top Layer (Sig 1) w0.25: v1(70.7,83.4) U2.C11@71.1,83.8
NetP4_3: U2.A11 | length 2.9
  Top Layer (Sig 1) w0.15: 71.1,79.3 U2.A11@71.1,82.2
NetP4_4: U2.B11 | length 0.6
  Top Layer (Sig 1) w0.25: v1(70.7,82.6) U2.B11@71.1,83
NetP4_5: U2.B10 | length 0.6
  Top Layer (Sig 1) w0.25: v1(71.5,82.6) U2.B10@71.9,83
NetP5_1: U2.E16 | length 3.6
  Top Layer (Sig 1) w0.15: 63.7,85 66.7,85 U2.E16@67.1,85.4
NetP5_2: U2.E15 | length 0.6
  Top Layer (Sig 1) w0.25: v1(67.5,85) U2.E15@67.9,85.4
NetP8_1: 
NetP8_2: R17.2 R18.2
NetP10_4: 
NetQ3_1: Q3.1 Q4.2
NetQ4_1: Q4.1 R18.1
NetR6_1: R6.1 U2.V12 | length 0.7
  Top Layer (Sig 1) w0.25: v1(69.8,96.3) U2.V12@70.3,95.8
NetR9_2: R9.2
NetR11_1: R11.1 U3.L8 | length 0.6
  Top Layer (Sig 1) w0.25: U3.L8@92.48,82.555 v2(92.88,82.155)
NetR14_2: R14.2 U2.J3 | length 0.6
  Top Layer (Sig 1) w0.25: U2.J3@77.5,88.6 v1(77.9,88.2)
NetR15_2: R15.2 U2.B4 | length 0.6
  Top Layer (Sig 1) w0.25: U2.B4@76.7,83 v1(77.1,82.6)
NetR80_2: 
NetR87_2: 
NetR88_2: 
NetR97_1: 
NetR98_1: R99.1
NetR102_1: 
NetR103_1: 
NetR104_1: 
NetR112_1: R112.1
NetR113_1: 
NetR117_1: 
NetR120_2: 
NetR124_2: 
NetR126_2: 
NetR127_1: 
NetR128_1: 
NetR129_1: 
NetR132_2: 
NetR136_2: 
NetS3_2: 
NetU2_K18: U2.K18 | length 1.8
  Top Layer (Sig 1) w0.15: 63.7,89.4 U2.K18@65.5,89.4
NRB0: R8.1 U2.T17 | length 3.8
  Top Layer (Sig 1) w0.15: 65.9,97.8 65.9,94.6 U2.T17@66.3,94.2
NRB1: R6.2 R7.2
NRE: U2.T7 U2.U17 | length 3.5
  Top Layer (Sig 1) w0.15: U2.U17@66.3,95 66.7,95.4 66.7,97.8
  Top Layer (Sig 1) w0.25: U2.T7@74.3,94.2 v1(74.7,94.6)
ODT: U2.G1 U3.K1 | length 24.1
  Top Layer (Sig 1) w0.25: v2(86.48,82.955) U3.K1@86.879,83.355
  Top Layer (Sig 1) w0.284: U2.G1@79.1,87 80.262,87.001 80.904,87.001 81.698,86.207 81.698,85.318 82.079,84.937 82.714,84.937 82.968,84.683 82.968,81.487 83.074,81.381 83.224,81.381 83.33,81.487 83.33,84.048 83.438,84.156 83.876,84.156 83.984,84.048 83.984,83.413 84.13,83.267 84.13,81.889 84.257,81.762 84.492,81.762 84.619,81.889 84.619,83.54 v3(84.492,83.667)
  Signal Layer 3 w0.234: v3(84.492,83.667) 84.492,84.175 84.238,84.429 84.238,84.81 84.365,84.937 84.746,84.937 85,84.683 85,83.286 84.873,83.159 84.619,83.159 84.492,83.032 84.492,82.778 84.619,82.651 85.508,82.651 85.813,82.955 v2(86.48,82.955)
PGOOD: U1.2 U2.B15 | length 3.9
  Top Layer (Sig 1) w0.15: U2.B15@67.9,83 68.3,82.6 68.3,79.3
PWR_EN: U2.C6 | length 0.6
  Top Layer (Sig 1) w0.25: U2.C6@75.1,83.8 v1(75.5,83.4)
RST_ATMega: U2.B14 | length 13.2
  Top Layer (Sig 1) w0.15: v1(63.5,75.3) 66.2,75.3 69.1,78.2 69.1,82.6 U2.B14@68.7,83
  Signal Layer 3 w0.15: 62.1,75.3 v1(63.5,75.3)
SB_N: U2.N18 | length 0.6
  Top Layer (Sig 1) w0.25: v1(65.1,92.2) U2.N18@65.5,91.8
SB_P: U2.N17 | length 0.6
  Top Layer (Sig 1) w0.25: v1(65.9,92.2) U2.N17@66.3,91.8
SD_CLK: U2.G17 | length 2.8
  Top Layer (Sig 1) w0.15: 63.7,87.4 65.9,87.4 U2.G17@66.3,87
SD_CMD: U2.G18 | length 1.8
  Top Layer (Sig 1) w0.15: 63.7,87 U2.G18@65.5,87
SD_DAT0: U2.G16 | length 0.6
  Top Layer (Sig 1) w0.15: v1(66.7,87.4) U2.G16@67.1,87
SD_DAT1: U2.G15 | length 0.6
  Top Layer (Sig 1) w0.15: v1(67.5,87.4) U2.G15@67.9,87
SD_DAT2: U2.F18 | length 1.8
  Top Layer (Sig 1) w0.15: 63.7,86.2 U2.F18@65.5,86.2
SD_DAT3: U2.F17 | length 2.8
  Top Layer (Sig 1) w0.15: 63.7,86.6 65.9,86.6 U2.F17@66.3,86.2
SPI0_CS0: U2.A16 | length 7.9
  Top Layer (Sig 1) w0.15: v1@63.5,76.791 64.757,76.791 67.1,79.134 U2.A16@67.1,82.2
  Signal Layer 2 w0.15: 63.2,76.8 v1(63.5,76.8)
SPI0_CS1: U2.C15 | length 10
  Top Layer (Sig 1) w0.25: v1(67.5,83.4) U2.C15@67.9,83.8
  Signal Layer 3 w0.15: 63.2,77.2 v1(64.1,77.2)
  Bottom Layer (Sig 4) w0.15: v1(64.1,77.2) 65.7,77.2 67.5,79 v1(67.5,83.4)
SPI0_MISO: U2.B17 | length 8.2
  Top Layer (Sig 1) w0.15: v1(64.1,77.9) 65.4,77.9 66.7,79.2 66.7,82.6 U2.B17@66.3,83
  Signal Layer 3 w0.15: 63.007,77.9 v1(64.1,77.9)
SPI0_MOSI: U2.B16 | length 12.1
  Top Layer (Sig 1) w0.15: v1(63.5,76.1) 63.875,76.475 64.875,76.475 67.5,79.1 67.5,82.6 U2.B16@67.1,83
  Signal Layer 2 w0.15: 61.5,74.1 v1(63.5,76.1)
SPI0_SCLK: U2.A17 | length 6.5
  Top Layer (Sig 1) w0.15: v1(64.1,78.6) 65.6,78.6 66.3,79.3 U2.A17@66.3,82.2
  Signal Layer 3 w0.15: 63,78.6 v1(64.1,78.6)
SPI1_CS0_CODEC: U2.E17 | length 2.8
  Top Layer (Sig 1) w0.15: 63.7,85.8 65.9,85.8 U2.E17@66.3,85.4
SPI1_CS1_ATMega: U2.A15 | length 12.8
  Top Layer (Sig 1) w0.15: v1(64.1,76.1) 65.1,76.1 67.9,78.9 U2.A15@67.9,82.2
  Signal Layer 3 w0.15: 62.295,72.295 64.1,74.1 v1(64.1,76.1)
SPI1_MOSI: U2.J15 | length 4.4
  Top Layer (Sig 1) w0.15: 63.7,89 67.5,89 U2.J15@67.9,88.6
SPI1_SCLK: U2.H16 | length 3.6
  Top Layer (Sig 1) w0.15: 63.7,88.2 66.7,88.2 U2.H16@67.1,87.8
SYS: 
UART_ATM-to-Proc: U2.L17 | length 17.1
  Top Layer (Sig 1) w0.15: 63.3,89.8 65.9,89.8 U2.L17@66.3,90.2
  Signal Layer 2 w0.25: 62.8,73 65.166,75.366 65.166,83.334 63.3,85.2
UART_Proc-to-ATM: U2.L16 | length 17.8
  Top Layer (Sig 1) w0.15: v1(66.7,89.8) U2.L16@67.1,90.2
  Signal Layer 2 w0.25: 62.766,73.566 64.7,75.5 64.7,83.2 62.8,85.1
  Bottom Layer (Sig 4) w0.25: 62.8,89.3 66.2,89.3 v1(66.7,89.8)
USB0_VBUS: U2.P15 | length 0.6
  Top Layer (Sig 1) w0.25: v1(67.5,93) U2.P15@67.9,92.6
VDDA_ADC: C47.1 C48.1 C104.1 C105.2 L2.2 U2.B9 U2.D8 | length 3.8
  Top Layer (Sig 1) w0.15: U2.B9@72.7,83 73.1,82.6 v1(73.1,79.9)
  Top Layer (Sig 1) w0.25: U2.D8@73.5,84.6 v1(73.9,84.2)
Vref_CODEC: C124.1 C129.1 C132.1 C133.2
WAKEUP: U2.C5 | length 0.6
  Top Layer (Sig 1) w0.25: U2.C5@75.9,83.8 v1(76.3,83.4)
pads on no net: Q2.3 Q2.4 S1. S1.1 U1.1 U2.A8 U2.B8 U2.B12 U2.C8 U2.C9 U2.C12 U2.C13 U2.D14 U2.E18 U2.F15 U2.F16 U2.H17 U2.H18 U2.J16 U2.J17 U2.J18 U2.K15 U2.K16 U2.K17 U2.L15 U2.M5 U2.M15 U2.M16 U2.M17 U2.M18 U2.N14 U2.P16 U2.P17 U2.P18 U2.R13 U2.R14 U2.R17 U2.R18 U2.T13 U2.T14 U2.T15 U2.T16 U2.T18 U2.U9 U2.U14 U2.U15 U2.U16 U2.U18 U2.V9 U2.V14 U2.V15 U2.V16 U2.V17 U3.J1 U3.J9 U3.L1 U3.L9
copper on no net:
  other v5: 72.3,89

## Polygon pours and split planes (outlines as drawn)
GND on Ground Plane 2 (split plane): 137.99,68.21 27.01,68.21 27.01,135.49 137.99,135.49
AGND on Ground Plane 1 (split plane): 137.99,68.21 27.01,68.21 27.01,135.49 137.99,135.49
+3.3VA on Power Plane 2 (split plane): 137.99,68.21 27.01,68.21 27.01,135.49 137.99,135.49
+1.1V_CORE on Power Plane 1 (split plane): 137.99,68.21 27.01,68.21 27.01,135.49 137.99,135.49

## Keep-outs
Keep-Out Layer:
  lines w0.1: 27.2,135.3 27.2,68.4 137.8,68.4 137.8,135.3

## Silkscreen, mask and mechanical layers (free items; w line width, h text height)
Mechanical 1:
  lines w0.15: 35,76 35,130 130,130 ; 35,76.009 130,76.009 130,130.009 ; 26.5,67.7 138.5,67.7 138.5,136 26.5,136 26.5,67.7
  text "Audio Input" at 14,185.1 h8
  text "PMIC" at 173.1,123 h8
  text "CODEC" at -16.1,116.5 h8
  text "Import" at 190.6,72.2 h8